# Altium PCB DiPho.PcbDoc
Units mm, origin at the board's own origin, x right, y up, seen from the top; angles counter-clockwise.
Board outline 25 x 25 mm, 2 copper layers (Top Layer, Bottom Layer), stack 1.571 mm thick; 59 components, 44 nets, 286 pads, 34 vias.
Unrouted connection lines stored in the file: 97.
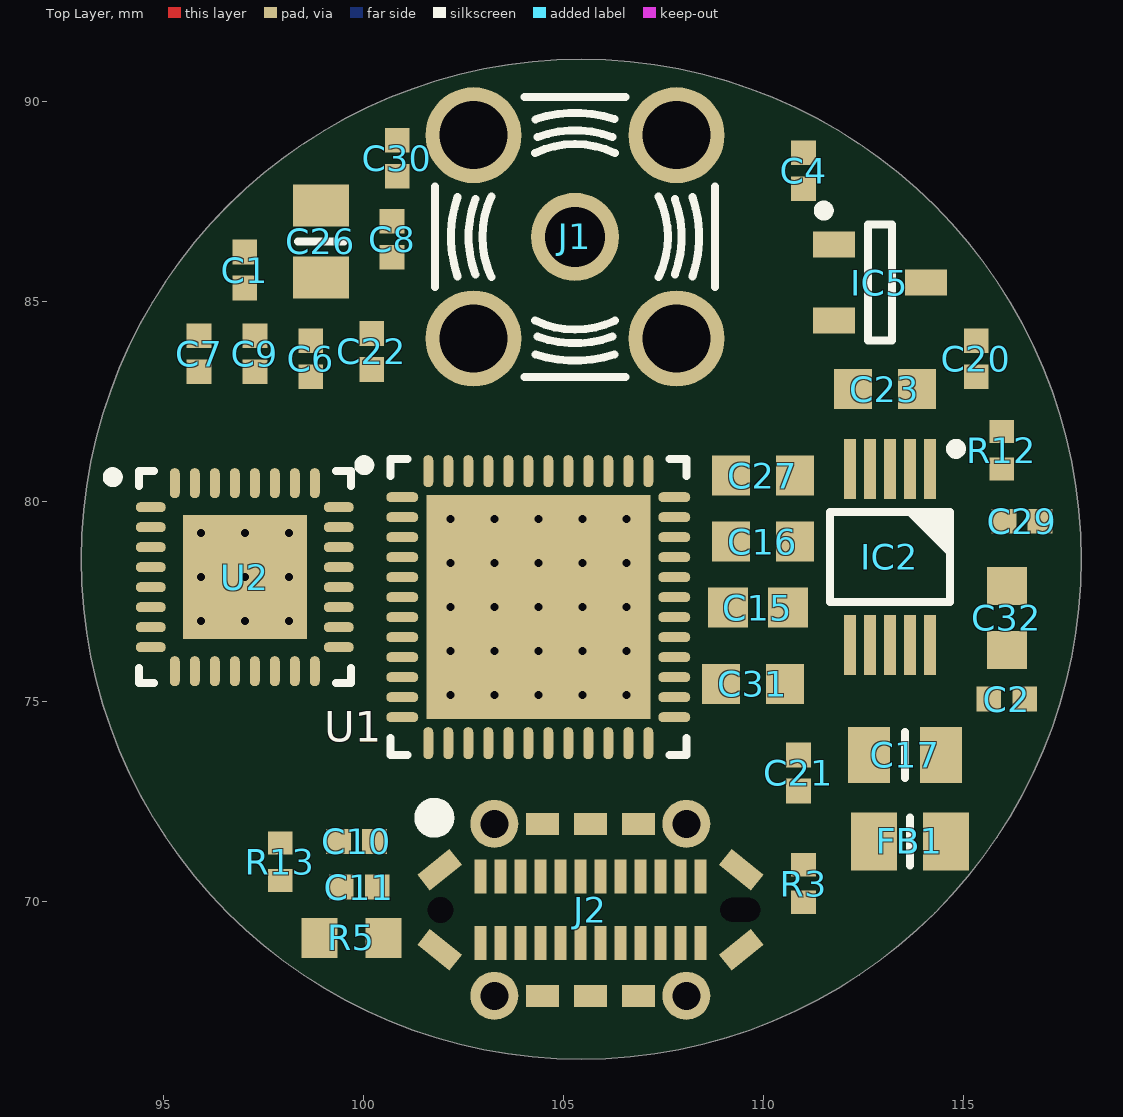
[diagram p0: Top Layer view]
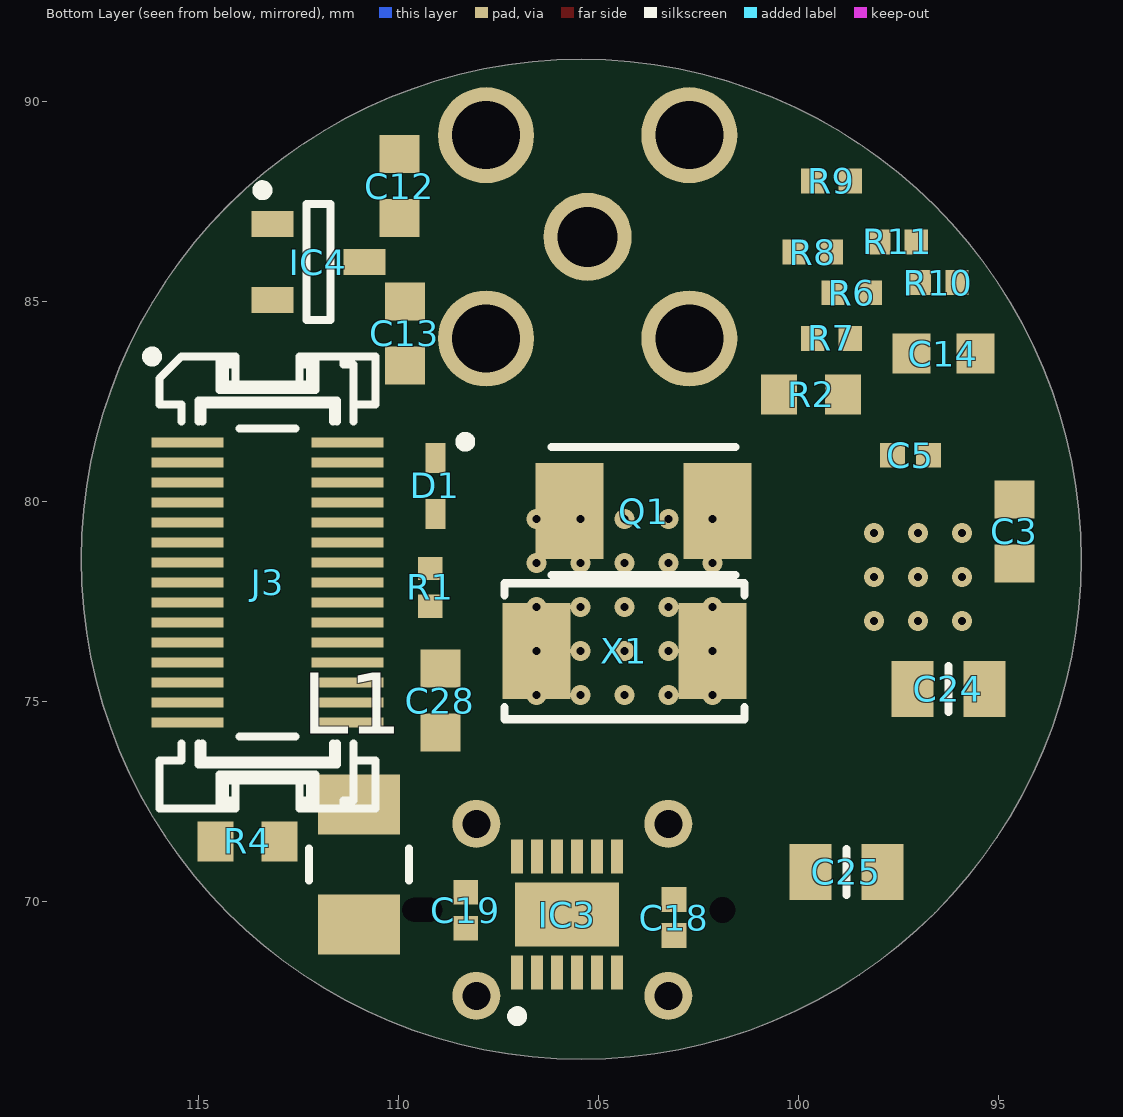
[diagram p1: Bottom Layer view, seen from below]

## Layer stack, top to bottom
Top Solder: solder mask 0.0102, Solder Resist, Dk 3.5
Top Layer: signal copper 0.0356
Dielectric 1: dielectric 1.5, FR-4, Dk 4.8
Bottom Layer: signal copper 0.0356
Bottom Solder: solder mask 0.0102, Solder Resist, Dk 3.5

## Board outline
92.941,78.552 ccw(c105.441,78.552) 105.441,66.052 ccw(c105.441,78.552) 117.941,78.552 ccw(c105.441,78.552) 105.441,91.052 ccw(c105.441,78.552)

## Design rules (kind name [scope] priority, off if disabled: settings)
Clearance [All] p1: gap=0.254 ignorepadtopadclearanceinfootprint=FALSE except(0: Arc-Hole Track-Hole SMDPad-Hole THPad-Hole Via-Hole Fill-Hole Poly-Hole Region-Hole Text-Hole)
DiffPairsRouting [All] p1: maxlimit=0.254 minlimit=0.254 mostfreqgap=0.254 toplayer_minwidth=0.381 toplayer_maxwidth=0.381 toplayer_prefwidth=0.381 bottomlayer_minwidth=0.381 bottomlayer_maxwidth=0.381 bottomlayer_prefwidth=0.381 maxuncoupledlength=12.7
PolygonConnect [All] p1: connectstyle=Relief reliefconductorwidth=0.254 reliefentries=4 polygonreliefangle="90 Angle" airgapwidth=0.254
RoomDefinition U_LAN [InComponentClass('U_LAN')] p1: confinementstyle=ConfineIn formatcopy=TRUE lockcomponents=FALSE outline 118.999,105.537 232.156,105.537 232.156,111.633 118.999,111.633
RoomDefinition "U_DiPho supply" [InComponentClass('U_DiPho supply')] p2: confinementstyle=ConfineIn formatcopy=TRUE lockcomponents=FALSE outline 119.126,95.377 188.849,95.377 188.849,104.267 119.126,104.267
RoomDefinition U_DiPHO_MCU [InComponentClass('U_DiPHO_MCU')] p3: confinementstyle=ConfineIn formatcopy=TRUE lockcomponents=FALSE outline 119.126,83.566 172.339,83.566 172.339,94.234 119.126,94.234
RoomDefinition DiPho_main [InComponentClass('DiPho_main')] p4: confinementstyle=ConfineIn formatcopy=TRUE lockcomponents=FALSE outline 118.999,67.564 147.701,67.564 147.701,82.296 118.999,82.296
RoutingVias [All] p1: holewidth=0.711 width=1.27 viastyle="Through Hole" minholewidth=0.711 minwidth=1.27 maxholewidth=0.711 maxwidth=1.27
SolderMaskExpansion [All] p1: expansion=0.102 istentingtop=FALSE
Width [All] p1: maxlimit=0.254 minlimit=0.254 preferedwidth=0.254
29 further rules are at their usual default settings.

## Classes and differential pairs
component class U_LAN: C10 C11 C12 C13 C14 C15 C16 C17 C18 C19 C20 C21 C22 C23 FB1 R2 R3 R4 R5 R6 R7 R8 R9 R10 R11 U2 X1
component class "U_DiPho supply": C24 C25 C26 C27 C28 C29 C30 C31 C32 IC3 IC4 IC5 L1 R12 R13
component class U_DiPHO_MCU: C1 C2 C3 C4 C5 C6 C7 C8 C9 D1 Q1 R1 U1
component class DiPho_main: IC2 J1 J2 J3
differential pair RJ45_TX: +RJ45_TX_P -RJ45_TX_N
differential pair RJ45_RX: +RJ45_RX_P -RJ45_RX_N
differential pair RJ45_RX_C: +RJ45_RX_C_P -RJ45_RX_C_N

## Components (designator, comment, footprint, x,y, rotation, side; value= is the part's Value field where it differs from the comment)
C1 "1nF" CAPC1005X55N 97.028,85.783 r270 top
C2 "1nF" CAPC1005X55N 116.078,75.057 r180 top
C3 "1uF" CAPC1608X87N 94.615,79.248 r270 bottom
C4 "22pF" CAPC1005X55N 110.998,88.265 r270 top
C5 "22pF" CAPC1005X55N 97.213,81.153 r0 bottom
C6 "100nF" CAPC1005X55N 98.679,83.566 r270 top
C7 "100nF" CAPC1005X55N 95.885,83.693 r270 top
C8 "100nF" CAPC1005X55N 100.711,86.556 r270 top
C9 "100nF" CAPC1005X55N 97.282,83.693 r90 top
C10 "22pF" CAPC1005X55N 99.822,71.501 r180 top
C11 "22pF" CAPC1005X55N 99.891,70.358 r0 top
C12 "6.8nF" CAPC1608X87N 109.982,87.884 r270 bottom
C13 "6.8nF" CAPC1608X87N 109.855,84.201 r270 bottom
C14 "10nF" CAPC1608X87N 96.393,83.693 r0 bottom
C15 "10uF" CAPC1608X80N 109.855,77.343 r0 top
C16 "10nF" CAPC1608X87N 109.982,78.994 r0 top
C17 "10uF" CAPC2012X135N 113.538,73.66 r180 top
C18 "100nF" CAPC1005X55N 103.124,69.596 r270 bottom
C19 "100nF" CAPC1005X55N 108.331,69.781 r270 bottom
C20 "100nF" CAPC1005X55N 115.316,83.566 r270 top
C21 "100nF" CAPC1005X55N 110.871,73.21 r270 top
C22 "100nF" CAPC1005X55N 100.203,83.751 r270 top
C23 "6.8nF" CAPC1608X87N 113.03,82.804 r0 top
C24 "10uF" CAPC2012X135N 96.266,75.311 r0 bottom
C25 "22uF" CAPC2012X135N 98.817,70.739 r0 bottom
C26 "22uF" CAPC2012X135N 98.933,86.498 r90 top
C27 "2.2uF" CAPC1608X87N 109.982,80.645 r0 top
C28 "1uF" CAPC1608X87N 108.966,75.019 r270 bottom
C29 "100nF" CAPC1005X55N 116.459,79.502 r0 top
C30 "100nF" CAPC1005X55N 100.838,88.577 r270 top
C31 "1uF" CAPC1608X87N 109.728,75.438 r180 top
C32 "1uF" CAPC1608X87N 116.078,77.089 r270 top
D1 "1PS79SB70" SODFL1608X65N 109.093,80.391 r270 bottom
FB1 "220R@100MHz" INDC2012X105N 113.654,71.501 r180 top
IC2 "ADS1115IDGST" SOP50P490X110-10N 113.157,78.613 r270 top
IC3 "TPS63710DRR" SON50P300X300X80-13N-R160X260 105.795,69.67 r90 bottom
IC4 "NCP51460SN33T1G" SOT95P240X110-3N 112.014,85.979 r180 bottom
IC5 "AP7313-33SAG-7" SOT95P240X130-3N 112.903,85.471 r0 top
J1 "SMA" AMPHENOL_132134 105.283,86.614 r180 top
J2 "USB C" AMPHENOL_10132328-10011LF 105.668,69.791 r0 top
J3 "SlimStack™" MOLEX_52991-0308 113.284,77.978 r270 bottom
L1 "2.2uH" INDM3225X210N 110.998,70.917 r90 bottom
Q1 "8MHz" XTAL_TXC_7A 103.886,79.756 r0 bottom
R1 "10k" RESC1005X40N 109.22,77.851 r90 bottom
R2 "12k4" RESC1608X55N 99.695,82.677 r0 bottom
R3 "1M5" RESC1005X40N 110.998,70.447 r90 top
R4 "12k4" RESC1608X55N 113.792,71.501 r0 bottom
R5 "12k4" RESC1608X55N 99.695,69.088 r180 top
R6 "49R9" RESC1005X40N 98.679,85.217 r0 bottom
R7 "49R9" RESC1005X40N 99.187,84.074 r0 bottom
R8 "49R9" RESC1005X40N 99.657,86.233 r0 bottom
R9 "10" RESC1005X40N 99.187,88.011 r0 bottom
R10 "49R9" RESC1005X40N 96.52,85.471 r0 bottom
R11 "49R9" RESC1005X40N 97.536,86.487 r0 bottom
R12 "150k" RESC1005X40N 115.951,81.28 r270 top
R13 "43k" RESC1005X40N 97.917,70.993 r270 top
U1 "STM32F072CBU6" STM-UFQFPN48_L 104.365,77.355 r0 top
U2 "KSZ8851SNLI TR" MCHP-MLF-32_L 97.028,78.105 r0 top
X1 "QSDG25M000-TXC" XTAL_5.0*3.2 104.365,76.255 r0 bottom

## Footprints (in the part's own frame and the unit in brackets; to place one, negate y for a bottom-side part, rotate by r counter-clockwise, add the part's x,y. Pads: shape width x height; smd on the part's side, far side on the other; paste and mask are expansions set on the pad)
AMPHENOL_132134 [mm] "50 Ohm Through Hole SMA Straight PCB Jack"
  round 2.2 hole 1.5: 1(0,0)
  round 2.4 hole 1.7: 2(-2.54,2.54) 2(-2.54,-2.54) 2(2.54,2.54) 2(2.54,-2.54)
  silkscreen extent -3.5,-3.5 3.5,3.5, body extent -3.5,-3.5 3.5,3.5, height 9.53
AMPHENOL_10132328-10011LF [mm] "1 Port Vertical Receptacle 24 Contacts, USB Type C Input Output Connector"
  rect 0.3x0.85 smd: A1(-2.75,0.83) A2(-2.25,0.83) A3(-1.75,0.83) A4(-1.25,0.83) A5(-0.75,0.83) A6(-0.25,0.83) A7(0.25,0.83) A8(0.75,0.83) A9(1.25,0.83) A10(1.75,0.83) A11(2.25,0.83) A12(2.75,0.83) B1(2.75,-0.83) B2(2.25,-0.83) B3(1.75,-0.83) B4(1.25,-0.83) B5(0.75,-0.83) B6(0.25,-0.83) B7(-0.25,-0.83) B8(-0.75,-0.83) B9(-1.25,-0.83) B10(-1.75,-0.83) B11(-2.25,-0.83) B12(-2.75,-0.83)
  round 0.25 hole 0.65 unplated mask+0.2: MECH(-3.75,0)
  oval 0.6x0.2 hole 0.6 slot 1 at 0 deg unplated mask+0.2: MECH(3.75,0)
  rect 1.03x0.5 smd rot 141: SHIELD(-3.77,-1) SHIELD(3.77,1)
  rect 1.03x0.5 smd rot 39: SHIELD(-3.77,1) SHIELD(3.77,-1)
  round 1.2 hole 0.7: SHIELD(-2.4,-2.15) SHIELD(-2.4,2.15) SHIELD(2.4,-2.15) SHIELD(2.4,2.15)
  rect 0.82x0.55 smd: SHIELD(-1.2,-2.15) SHIELD(-1.2,2.15) SHIELD(0,-2.15) SHIELD(0,2.15) SHIELD(1.2,-2.15) SHIELD(1.2,2.15)
  silkscreen extent -4.15,2.05 -3.65,2.55, body extent -4.37,-2.25 4.37,2.25, height 8.83
CAPC1005X55N [mm] "Capacitor, Non-Polarized, Chip; 1.00mm L X 0.50mm W X 0.70mm H, IPC Medium Density"
  rect 0.62x0.62 smd: 1(-0.45,0) 2(0.45,0)
  body extent -0.52,-0.27 0.53,0.28, height 0.55
CAPC1608X80N [mm] "Chip Capacitor, Body 1.6x0.8mm IPC Medium Density"
  rect 1x1 smd: 1(-0.75,0) 2(0.75,0)
  body extent -0.87,-0.47 0.88,0.48, height 0.8
CAPC1608X87N [mm] "Chip Capacitor, Body 1.6x0.8mm IPC Medium Density"
  rect 0.95x1 smd: 1(-0.8,0) 2(0.8,0)
  body extent -0.87,-0.47 0.88,0.48, height 0.87
CAPC2012X135N [mm] "Chip Capacitor, Body 2.0x1.25mm, IPC Medium Density"
  rect 1.05x1.4 smd: 1(-0.9,0) 2(0.9,0)
  silkscreen extent 0,-0.58 0,0.58, body extent -1.05,-0.67 1.05,0.68, height 1.25
INDC2012X105N [mm] "Chip Inductor, EIA 0805, Metric 2012, Body 2.0x1.25mm, IPC Medium Density"
  rect 1.15x1.45 smd: 1(-0.9,0) 2(0.9,0)
  silkscreen extent 0,-0.6 0,0.6, body extent -1.1,-0.7 1.1,0.7, height 1.1
INDM3225X210N [mm] "Inductor, Molded Body; 3.20mm L X 2.50mm W, IPC Medium Density"
  rect 1.5x2.05 smd: 1(-1.5,0) 2(1.5,0)
  silkscreen extent -0.4,-1.25 0.4,1.25, body extent -1.7,-1.35 1.7,1.35, height 2.1
MCHP-MLF-32_L [mm] "QFN, 32-Leads, Body 5.00x5.00mm, Pitch 0.50mm, Thermal Pad 3.10x3.10mm, IPC High Density"
  oval 0.75x0.25 smd: 1(-2.35,1.75) 2(-2.35,1.25) 3(-2.35,0.75) 4(-2.35,0.25) 5(-2.35,-0.25) 6(-2.35,-0.75) 7(-2.35,-1.25) 8(-2.35,-1.75) 17(2.35,-1.75) 18(2.35,-1.25) 19(2.35,-0.75) 20(2.35,-0.25) 21(2.35,0.25) 22(2.35,0.75) 23(2.35,1.25) 24(2.35,1.75)
  oval 0.25x0.75 smd: 9(-1.75,-2.35) 10(-1.25,-2.35) 11(-0.75,-2.35) 12(-0.25,-2.35) 13(0.25,-2.35) 14(0.75,-2.35) 15(1.25,-2.35) 16(1.75,-2.35) 25(1.75,2.35) 26(1.25,2.35) 27(0.75,2.35) 28(0.25,2.35) 29(-0.25,2.35) 30(-0.75,2.35) 31(-1.25,2.35) 32(-1.75,2.35)
  rect 3.1x3.1 smd: 33(0,0)
  silkscreen extent -3.42,-2.65 2.65,2.65, body extent -2.5,-2.5 2.5,2.5, height 0.9
MOLEX_52991-0308 [mm] "0.50mm Pitch SlimStack™ Dual Row 30 Circuits Surface Mount Vertical Receptacle (3.00 and 4.00mm Stacking Heights)"
  rect 0.25x1.8 smd: 1(-3.5,-2) 2(-3.5,2) 3(-3,-2) 4(-3,2) 5(-2.5,-2) 6(-2.5,2) 7(-2,-2) 8(-2,2) 9(-1.5,-2) 10(-1.5,2) 11(-1,-2) 12(-1,2) 13(-0.5,-2) 14(-0.5,2) 15(0,-2) 16(0,2) 17(0.5,-2) 18(0.5,2) 19(1,-2) 20(1,2) 21(1.5,-2) 22(1.5,2) 23(2,-2) 24(2,2) 25(2.5,-2) 26(2.5,2) 27(3,-2) 28(3,2) 29(3.5,-2) 30(3.5,2)
  silkscreen extent -5.77,-3.01 5.65,2.7, body extent -5.65,-2.7 5.65,2.7, height 2.32
RESC1005X40N [mm] "Chip Resistor, EIA 0402, Metric 1005, Body 1.0x0.5mm, IPC Medium Density"
  rect 0.58x0.62 smd: 1(-0.47,0) 2(0.47,0)
  body extent -0.52,-0.27 0.53,0.28, height 0.4
RESC1608X55N [mm] "Chip Resistor, EIA 0603, Metric 1608, Body 1.6x0.8mm, IPC Medium Density"
  rect 0.9x1 smd: 1(-0.8,0) 2(0.8,0)
  body extent -0.87,-0.47 0.88,0.48, height 0.55
SODFL1608X65N [mm] "Ultra Small Outline Diode Flat Lead (SOD-523), Body; 1.2mm L X 0.8mm W X 0.65mm H, IPC Medium Density"
  rect 0.75x0.5 smd: 1(-0.7,0) 2(0.7,0)
  silkscreen extent -1.22,0.63 -0.98,0.87, body extent -0.82,-0.42 0.83,0.43, height 0.65
SON50P300X300X80-13N-R160X260 [mm] "SON, 0.50mm Pitch, 12-Pin, 3.00mm W  X 3.00mm L X 0.80mm Height, (w/Thermal Tab 1.6 X 2.6 mm), IPC Medium Density"
  rect 0.85x0.3 smd: 1(-1.45,1.25) 2(-1.45,0.75) 3(-1.45,0.25) 4(-1.45,-0.25) 5(-1.45,-0.75) 6(-1.45,-1.25) 7(1.45,-1.25) 8(1.45,-0.75) 9(1.45,-0.25) 10(1.45,0.25) 11(1.45,0.75) 12(1.45,1.25)
  rect 1.6x2.6 smd: 13(0,0)
  silkscreen extent -2.66,1.13 -2.42,1.38, body extent -1.5,-1.5 1.5,1.5, height 0.8
SOP50P490X110-10N [mm] "MSOP, 10-Leads, Body 3.1x3.1mm (max), Pitch 0.50mm, IPC Medium Density"
  rect 1.5x0.3 smd: 1(-2.2,1) 2(-2.2,0.5) 3(-2.2,0) 4(-2.2,-0.5) 5(-2.2,-1) 6(2.2,-1) 7(2.2,-0.5) 8(2.2,0) 9(2.2,0.5) 10(2.2,1)
  silkscreen extent -2.82,-1.5 1.12,1.78, body extent -2.45,-1.55 2.45,1.55, height 1.1
SOT95P240X110-3N [mm] "SOT23 3-Leads, Pitch 0.95mm, Body 1.3x2.9mm, IPC Medium Density"
  rect 1.05x0.65 smd: 1(-1.15,0.95) 2(-1.15,-0.95) 3(1.15,0)
  silkscreen extent -1.53,-1.45 0.3,1.92, body extent -1.25,-1.5 1.25,1.5, height 1.1
SOT95P240X130-3N [mm] "SOT23 3-Leads, Pitch 0.95mm - Body 1.3x2.9mm, IPC Medium Density"
  rect 1.05x0.65 smd: 1(-1.15,0.95) 2(-1.15,-0.95) 3(1.15,0)
  silkscreen extent -1.52,-1.45 0.3,1.92, body extent -1.25,-1.5 1.25,1.5, height 1.3
STM-UFQFPN48_L [mm] "QFN, 48-Leads, Body 7.1x7.1mm, Pitch 0.5mm, Thermal Pad 5.6x5.6mm, IPC High Density"
  oval 0.8x0.25 smd: 1(-3.4,2.75) 2(-3.4,2.25) 3(-3.4,1.75) 4(-3.4,1.25) 5(-3.4,0.75) 6(-3.4,0.25) 7(-3.4,-0.25) 8(-3.4,-0.75) 9(-3.4,-1.25) 10(-3.4,-1.75) 11(-3.4,-2.25) 12(-3.4,-2.75) 25(3.4,-2.75) 26(3.4,-2.25) 27(3.4,-1.75) 28(3.4,-1.25) 29(3.4,-0.75) 30(3.4,-0.25) 31(3.4,0.25) 32(3.4,0.75) 33(3.4,1.25) 34(3.4,1.75) 35(3.4,2.25) 36(3.4,2.75)
  oval 0.25x0.8 smd: 13(-2.75,-3.4) 14(-2.25,-3.4) 15(-1.75,-3.4) 16(-1.25,-3.4) 17(-0.75,-3.4) 18(-0.25,-3.4) 19(0.25,-3.4) 20(0.75,-3.4) 21(1.25,-3.4) 22(1.75,-3.4) 23(2.25,-3.4) 24(2.75,-3.4) 37(2.75,3.4) 38(2.25,3.4) 39(1.75,3.4) 40(1.25,3.4) 41(0.75,3.4) 42(0.25,3.4) 43(-0.25,3.4) 44(-0.75,3.4) 45(-1.25,3.4) 46(-1.75,3.4) 47(-2.25,3.4) 48(-2.75,3.4)
  rect 5.6x5.6 smd: 49(0,0)
  silkscreen extent -4.47,-3.7 3.7,3.7, body extent -3.55,-3.55 3.55,3.55, height 0.6
XTAL_5.0*3.2 [mm]
  rect 1.7x2.4 smd: 1(-2.2,0) 2(2.2,0)
  silkscreen extent -3,-1.7 3,1.7, body extent -3.05,-1.8 3.05,1.7, height 1.44
XTAL_TXC_7A [mm] "2 Pins, 3.2x5mm, SMD Glass Seam Sealing Crystal, 7A Serie"
  rect 1.7x2.4 smd: 1(-1.85,0) 2(1.85,0)
  silkscreen extent -2.3,-1.6 2.3,1.6, body extent -2.5,-1.6 2.5,1.6, height 1.2

## Part data
C1 C2: library part CC0402_1NF_50V_5%_C0G, "Non-polarised capacitor", Case=0402, Manufacturer=GENERIC, Manufacturer1 ComponentHeight=0.55mm, Manufacturer1 Example=KEMET, Manufacturer1 Part Number=C0402C102J5GACTU, Tolerance=±5%, Voltage=50V, Author="CERN DEM BC", Component Type=Standard, CreateDate=02/09/2019, HelpURL="\\cern.ch\dfs\Applications\Altium\Datasheets\CC0402_C0G_KEMET_(Commercial Grade).pdf", LatestRevisionDate=02/09/2019, Manufacturer Part Number=CC0402_1NF_50V_5%_C0G, Mounted=Yes, Part Description="SMD Multilayer Chip Ceramic Capacitor", Part Number=CC0402_1NF_50V_5%_C0G, Pin Count=2, Sense=No, SMD=Yes, Socket=No, Status=Preferred, TC=C0G/NP0
C3 C28 C31 C32: library part CC0603_1UF_16V_10%_X7R, "Non-polarised capacitor", Case=0603, Manufacturer=GENERIC, Manufacturer1 ComponentHeight=0.9mm, Manufacturer1 Example="YAGEO PHYCOMP", Manufacturer1 Part Number=223878615663, Manufacturer Part Number=CC0603_1uF_16V_10%_X7R, Tolerance=±10%, Voltage=16V, Author="CERN DEM JLC", Component Type=Standard, CreateDate=03.12.2007, HelpURL=\\cern.ch\dfs\Applications\Altium\Datasheets\CC0603_X7R_PHYCOMP.pdf, LatestRevisionDate=17.04.2015, Mounted=Yes, Part Description="SMD Multilayer Chip Ceramic Capacitor", Part Number=CC0603_1UF_16V_10%_X7R, Pin Count=2, Sense=No, SMD=Yes, Socket=No, Status=None, TC=X7R
C4 C5: library part CC0402_22PF_50V_5%_C0G, "Non-polarised capacitor", Case=0402, Manufacturer=GENERIC, Manufacturer1 ComponentHeight=0.55mm, Manufacturer1 Example=KEMET, Manufacturer1 Part Number=C0402C220J5GACTU, Tolerance=±5%, Voltage=50V, Author="CERN DEM JLC", Component Type=Standard, CreateDate=03.12.2007, HelpURL="\\cern.ch\dfs\Applications\Altium\Datasheets\CC0805_C0G_KEMET_(Commercial Grade).pdf", LatestRevisionDate=03.12.2007, Manufacturer Part Number=CC0402_22PF_50V_5%_C0G, Mounted=Yes, Part Description="SMD Multilayer Chip Ceramic Capacitor", Part Number=CC0402_22PF_50V_5%_C0G, Pin Count=2, Sense=No, SMD=Yes, Socket=No, Status=Preferred, TC=C0G/NP0
C6 C7 C8 C9 C18 C19 C20 C21 C22: library part CC0402_100NF_16V_10%_X7R, "Non-polarised capacitor", Case=0402, Manufacturer=GENERIC, Manufacturer1 ComponentHeight=0.55mm, Manufacturer1 Example=MURATA, Manufacturer1 Part Number=GRM155R71C104KA88D, Tolerance=±10%, Voltage=16V, Author="CERN DEM JLC", Component Type=Standard, CreateDate=05.12.2013, HelpURL=\\cern.ch\dfs\Applications\Altium\Datasheets\CC0402_X7R_MURATA_GRM.pdf, LatestRevisionDate=03.12.2007, Manufacturer Part Number=CC0402_100NF_16V_10%_X7R, Mounted=Yes, Part Description="SMD Multilayer Chip Ceramic Capacitor", Part Number=CC0402_100NF_16V_10%_X7R, Pin Count=2, Sense=No, SMD=Yes, Socket=No, Status="Not Recommended", TC=X7R
C10 C11: library part CC0402_22PF_50V_5%_NP0, "Non-polarised capacitor", Case=0402, Manufacturer=GENERIC, Manufacturer1 ComponentHeight=0.55mm, Manufacturer1 Example=PHYCOMP, Manufacturer1 Part Number=223886915229, Tolerance=±5%, Voltage=50V, Author="CERN DEM JLC", Component Type=Standard, CreateDate=2007-12-03, HelpURL=\\cern.ch\dfs\Applications\Altium\Datasheets\CC0402_NP0_PHYCOMP.pdf, LatestRevisionDate=2007-12-03, Manufacturer Part Number=CC0402_22PF_50V_5%_NP0, Mounted=Yes, Part Description="SMD Multilayer Chip Ceramic Capacitor", Part Number=CC0402_22PF_50V_5%_NP0, Pin Count=2, SMD=Yes, Socket=No, Status="Not Recommended", Table="Capacitors SMD", TC=NP0
C12 C13 C23: library part CC0603_6.8NF_25V_1%_C0G, "Non-polarised capacitor", Case=0603, Manufacturer=GENERIC, Manufacturer1 ComponentHeight=0.87mm, Manufacturer1 Example=KEMET, Manufacturer1 Part Number=C0603C682F3GACTU, Tolerance=±1%, Voltage=25V, Author="CERN DEM JLC", Component Type=Standard, CreateDate=23/05/2018, HelpURL="\\cern.ch\dfs\Applications\Altium\Datasheets\CC0603_C0G_KEMET_(Commercial Grade).pdf", LatestRevisionDate=23/05/2018, Manufacturer Part Number=CC0603_6.8NF_25V_1%_C0G, Mounted=Yes, Part Description="SMD Multilayer Chip Ceramic Capacitor", Part Number=CC0603_6.8NF_25V_1%_C0G, Pin Count=2, Sense=No, SMD=Yes, Socket=No, Status=None, TC=C0G/NP0
C14 C16: library part CC0603_10NF_50V_5%_C0G, "Non-polarised capacitor", Case=0603, Manufacturer=GENERIC, Manufacturer1 ComponentHeight=0.9mm, Manufacturer1 Example=TDK, Manufacturer1 Part Number=C1608C0G1H103J080AA, Tolerance=±5%, Voltage=50V, Author="CERN DEM JLC", Component Type=Standard, CreateDate=10.12.2014, HelpURL=\\cern.ch\dfs\Applications\Altium\Datasheets\CC0603_C0G_TDK_C.pdf, LatestRevisionDate=10.12.2014, Manufacturer Part Number=CC0603_10NF_50V_5%_C0G, Mounted=Yes, Part Description="SMD Multilayer Chip Ceramic Capacitor", Part Number=CC0603_10NF_50V_5%_C0G, Pin Count=2, Sense=No, SMD=Yes, Socket=No, Status=Preferred, TC=C0G/NP0
C15: library part CC0603_10UF_16V_20%_X5R, "Non-polarised capacitor", Case=0603, Manufacturer=GENERIC, Manufacturer1 ComponentHeight=0.8mm, Manufacturer1 Example=MURATA, Manufacturer1 Part Number=GRM188R61C106MA73D, Tolerance=±20%, Voltage=16V, Author="CERN DEM MR", Component Type=Standard, CreateDate=02/03/2016, HelpURL=\\cern.ch\dfs\Applications\Altium\Datasheets\CC0603_X5R_MURATA_GRM.pdf, LatestRevisionDate=02/03/2016, Manufacturer Part Number=CC0603_10UF_16V_20%_X5R, Mounted=Yes, Part Description="SMD Multilayer Chip Ceramic Capacitor", Part Number=CC0603_10UF_16V_20%_X5R, Pin Count=2, Sense=No, SMD=Yes, Socket=No, Status=None, TC=X5R
C17: library part CC0805_10UF_10V_10%_X7R, "Non-polarised capacitor", Case=0805, Manufacturer=GENERIC, Manufacturer1 ComponentHeight=1.35mm, Manufacturer1 Example=MURATA, Manufacturer1 Part Number=GRM21BR71A106KE51L, Tolerance=±10%, Voltage=10V, Author="CERN DEM JLC", Component Type=Standard, CreateDate=2012-04-30, HelpURL=\\cern.ch\dfs\Applications\Altium\Datasheets\CC0805_X7R_MURATA.pdf, LatestRevisionDate=2012-04-30, Manufacturer Part Number=CC0805_10UF_10V_10%_X7R, Mounted=Yes, Part Description="SMD Multilayer Chip Ceramic Capacitor", Part Number=CC0805_10UF_10V_10%_X7R, Pin Count=2, SMD=Yes, Socket=No, Status=Preferred, Table="Capacitors SMD", TC=X7R
C24: library part CC0805_10UF_16V_10%_X5R, "Non-polarised capacitor", Case=0805, Manufacturer=GENERIC, Manufacturer1 ComponentHeight=1.4mm, Manufacturer1 Example=KEMET, Manufacturer1 Part Number=C0805C106K4PAC, Tolerance=±10%, Voltage=16V, Author="CERN DEM JLC", Component Type=Standard, CreateDate=03.12.2007, HelpURL=\\cern.ch\dfs\Applications\Altium\Datasheets\CC1206_X5R_KEMET.pdf, LatestRevisionDate=03.12.2007, Manufacturer Part Number=CC0805_10UF_16V_10%_X5R, Mounted=Yes, Part Description="SMD Multilayer Chip Ceramic Capacitor", Part Number=CC0805_10UF_16V_10%_X5R, Pin Count=2, Sense=No, SMD=Yes, Socket=No, Status=Preferred, TC=X5R
C25 C26: library part CC0805_22UF_16V_10%_X5R, "Non-polarised capacitor", Case=0805, Manufacturer=GENERIC, Manufacturer1 ComponentHeight=1.35mm, Manufacturer1 Example=TDK, Manufacturer1 Part Number=C2012X5R1C226KT, Tolerance=±10%, Voltage=16V, Author="CERN DEM JLC", Component Type=Standard, CreateDate=25.10.2012, HelpURL=\\cern.ch\dfs\Applications\Altium\Datasheets\CC0805_X5R_TDK_C.pdf, LatestRevisionDate=25.10.2012, Manufacturer Part Number=CC0805_22UF_16V_10%_X5R, Mounted=Yes, Part Description="SMD Multilayer Chip Ceramic Capacitor", Part Number=CC0805_22UF_16V_10%_X5R, Pin Count=2, Sense=No, SMD=Yes, Socket=No, Status=Preferred, TC=X5R
C27: library part CC0603_2.2UF_16V_10%_X5R, "Non-polarised capacitor", Case=0603, Manufacturer=GENERIC, Manufacturer1 ComponentHeight=0.9mm, Manufacturer1 Example=YAGEO, Manufacturer1 Part Number=CC0603KRX5R7BB225, Tolerance=±10%, Voltage=16V, Author="CERN DEM JLC", Component Type=Standard, CreateDate=28.04.2011, HelpURL=\\cern.ch\dfs\Applications\Altium\Datasheets\CC0805_X5R_PHYCOMP_HC.pdf, LatestRevisionDate=28.04.2011, Manufacturer Part Number=CC0603_2.2UF_16V_10%_X5R, Mounted=Yes, Part Description="SMD Multilayer Chip Ceramic Capacitor", Part Number=CC0603_2.2UF_16V_10%_X5R, Pin Count=2, Sense=No, SMD=Yes, Socket=No, Status=Preferred, TC=X5R
C29 C30: library part CC0402_100NF_16V_10%_X5R, "Non-polarised capacitor", Case=0402, Manufacturer=GENERIC, Manufacturer1 ComponentHeight=0.55mm, Manufacturer1 Example=MURATA, Manufacturer1 Part Number=GRM155R61C104KA88D, Tolerance=±10%, Voltage=16V, Author="CERN DEM JLC", Component Type=Standard, CreateDate=10.12.2013, HelpURL=\\cern.ch\dfs\Applications\Altium\Datasheets\CC0402_X5R_MURATA_GRM.pdf, LatestRevisionDate=10.12.2013, Manufacturer Part Number=CC0402_100NF_16V_10%_X5R, Mounted=Yes, Part Description="SMD Multilayer Chip Ceramic Capacitor", Part Number=CC0402_100NF_16V_10%_X5R, Pin Count=2, Sense=No, SMD=Yes, Socket=No, Status=None, TC=X5R
D1: "Diode", Case=SOD523, Manufacturer=NEXPERIA, Power=70mA, Voltage=70V, Author=GK, Bonding=No, Component Type=Standard, ComponentHeight=0.65mm, CreateDate=11/09/2018, Device=1PS79SB70, HelpURL=\\cern.ch\dfs\Applications\Altium\Datasheets\BAS516.pdf, LatestRevisionDate=11/09/2018, Manufacturer Part Number=1PS79SB70, Mounted=Yes, PackageDescription="Ultra Small Outline Diode Flat Lead (SOD-523), Body; 1.2mm L X 0.8mm W X 0.65mm H, IPC Medium Density", Part Description="High-speed switching diode", Part Number=1PS79SB70, Pin Count=2, PressFit=No, Sense=No, SMD=Yes, Socket=No
FB1: library part IND0805_MURATA_BLM21PG221SN1D, "Inductor", Case=0805, Manufacturer=MURATA, Manufacturer Part Number=BLM21PG221SN1D, Power=2A, Resistance=0.05R, Tolerance=±25%, Author="CERN DEM JLC", Component Type=Standard, ComponentHeight=1.05mm, CreateDate=2010-01-25, HelpURL=\\cern.ch\dfs\Applications\Altium\Datasheets\IND0402_MURATA_BLM21P.pdf, LatestRevisionDate=2010-01-25, Mounted=Yes, Part Description="SMD EMIFIL Suppression Chip Ferrite Bead", Part Number=IND0805_MURATA_BLM21PG221SN1D, Pin Count=2, SMD=Yes, Socket=No, Status=None, Table="Inductors SMD"
IC2: "Ultra-Small, Low-Power, 16-Bit Analog-to-Digital Converter with Internal Reference", Case=MSOP10, Manufacturer="TEXAS INSTRUMENTS", Author="CERN DEM JLC", Bonding=No, Component Type=Standard, ComponentHeight=1.1mm, CreateDate=29.10.2012, Device=ADS1115IDGST, HelpURL=\\cern.ch\dfs\Applications\Altium\Datasheets\ADS1115IDGST.pdf, LatestRevisionDate=29.10.2012, Manufacturer Part Number=ADS1115IDGST, Mounted=Yes, PackageDescription="SOP, 0.50mm Pitch; 10 Pin, 3.00mm W X 3.00mm L X 1.10mm H body, IPC Medium Density", Part Description="Ultra-Small, Low-Power, 4 Channels 16-Bit Analog-to-Digital Converter with Internal Reference", Part Number=ADS1115IDGST, Pin Count=10, PressFit=No, Sense=No, SMD=Yes, Socket=No
IC3: "-1 to -5.5VDC, 1A Output, Low Noise Synchronous Inverting Buck Converter", Case=SON12, Manufacturer="TEXAS INSTRUMENTS", Author="CERN DEM BC", Bonding=No, Component Type=Standard, ComponentHeight=0.8mm, CreateDate=11.02.2019, Device=TPS63710DRR, HelpURL=\\cern.ch\dfs\Applications\Altium\Datasheets\TPS63710DRR.pdf, LatestRevisionDate=11.02.2019, Manufacturer Part Number=TPS63710DRR, Mounted=Yes, PackageDescription="SON, 0.50mm Pitch, 12-Pin, 3.00mm W  X 3.00mm L X 0.80mm Height, (w/Thermal Tab 1.6 X 2.6 mm), IPC Medium Density", Part Description="-1 to -5.5VDC, 1A Output, Low Noise Synchronous Inverting Buck Converter", Part Number=TPS63710DRR, Pin Count=13, PressFit=No, Sense=No, SMD=Yes, Socket=No
IC4: "3-Terminal Regulator 1=IN 2=OUT 3=GND", Case=SOT23, Manufacturer="ON SEMICONDUCTOR", Author="CERN DEM MR", Bonding=No, ComponentHeight=1.1mm, Component Type=Standard, CreateDate=05.10.2016, Device=NCP51460SN33T1G, HelpURL=\\cern.ch\dfs\Applications\Altium\Datasheets\NCP51460SN33T1G.pdf, LatestRevisionDate=05.10.2016, Manufacturer Part Number=NCP51460SN33T1G, Mounted=Yes, PackageDescription="SOT23 3-Leads, Pitch 0.95mm - Body 1.4x3mm, IPC Medium Density", Part Description="3.3V, 20mA Micropower Precision Voltage Reference", Part Number=NCP51460SN33T1G, Pin Count=3, PressFit=No, Sense=No, SMD=Yes, Socket=No
IC5: "3-Terminal Regulator 1=IN 2=OUT 3=GND", Case=SOT23, Manufacturer="DIODES INCORPORATED", Author="CERN DEM JLC", Bonding=No, Component Type=Standard, ComponentHeight=1.35mm, CreateDate=20.03.2018, Device=AP7313-33SAG-7, HelpURL=\\cern.ch\dfs\Applications\Altium\Datasheets\AP7313-33SAG-7.pdf, LatestRevisionDate=20.03.2018, Manufacturer Part Number=AP7313-33SAG-7, Mounted=Yes, PackageDescription="SOT23 3-Leads, Pitch 0.95mm - Body 1.3x2.9mm, IPC Medium Density", Part Description="3.3V, 150mA Low Quiescent Current, Fast Transient Low Dropout Linear Regulator", Part Number=AP7313-33SAG-7, Pin Count=3, PressFit=No, Sense=No, SMD=Yes, Socket=No
J1: library part AMPHENOL_132134, Manufacturer=AMPHENOL, Manufacturer Part Number=132134, Author="CERN DEM JLC", Component Type=Standard, ComponentHeight=9.53mm, CreateDate=16.12.2013, Family=SMA, HelpURL=\\cern.ch\dfs\Applications\Altium\Datasheets\AMPHENOL_132134.pdf, LatestRevisionDate=16.12.2013, Mounted=Yes, Part Description="50 Ohm Through Hole SMA Straight PCB Jack", Part Number=AMPHENOL_132134, Pin Count=4, PressFit=No, Sense=No, SMD=No, Socket=No, Status=None
J2: library part AMPHENOL_10132328-10011LF, "2x12 Pin + 1 Shield  USB Type C Receptacle", Manufacturer=AMPHENOL, Manufacturer Part Number=10132328-10011LF, Author="CERN DEM BC", Component Type=Standard, ComponentHeight=8.8mm, CreateDate=23.10.2020, Family="USB C", HelpURL=\\cern.ch\dfs\Applications\Altium\Datasheets\AMPHENOL_10132328-10011LF.pdf, LatestRevisionDate=23.10.2020, Mounted=Yes, Part Description="1 Port Vertical Receptacle 24 Contacts, USB Type C Input Output Connector", Part Number=AMPHENOL_10132328-10011LF, Pin Count=34, PressFit=No, Sense=No, SMD=Yes, Socket=No, Status=None
J3: library part MOLEX_52991-0308, "Connector 30 Female", Manufacturer=MOLEX, Manufacturer Part Number=52991-0308, Author="CERN DEM JLC", Component Type=Standard, ComponentHeight=2.27mm, CreateDate=28.08.2012, Family=SlimStack™, HelpURL=\\cern.ch\dfs\Applications\Altium\Datasheets\MOLEX_52991-0308.pdf, LatestRevisionDate=28.08.2012, Mounted=Yes, Part Description="0.50mm Pitch SlimStack™ Dual Row 30 Circuits Surface Mount Vertical Receptacle (3.00 and 4.00mm Stacking Heights)", Part Number=MOLEX_52991-0308, Pin Count=30, PressFit=No, Sense=No, SMD=Yes, Socket=No, Status=None
L1: library part IND1210_2.2UH_10%_EPCOS_B82422A, "Inductor With Core", Case=1210, Manufacturer=EPCOS, Manufacturer Part Number=B82422A1222K100, Power=270mA, Resistance=0.75R, Tolerance=±10%, Author="CERN DEM JLC", Component Type=Standard, ComponentHeight=2.1mm, CreateDate=01.03.2010, HelpURL=\\cern.ch\dfs\Applications\Altium\Datasheets\IND1210_EPCOS_B82422A.pdf, LatestRevisionDate=01.03.2010, Mounted=Yes, Part Description="SMT Inductor SIMID Series", Part Number=IND1210_2.2UH_10%_EPCOS_B82422A, Pin Count=2, Sense=No, SMD=Yes, Socket=No, Status=None
Q1: library part XTAL_8MHZ_TXC_7A-8.000MAAE-T, "Quartz Crystal", Manufacturer="TXC CORPORATION", Manufacturer Part Number=7A-8.000MAAE-T, Author="CERN DEM JLC", Bonding=No, ComponentHeight=1.2mm, Component Type=Standard, CreateDate=09.10.2014, HelpURL=\\cern.ch\dfs\Applications\Altium\Datasheets\XTAL_TXC_7A.pdf, LatestRevisionDate=12.11.2014, Mounted=Yes, PackageDescription="2 Pins, 3.2x5mm, SMD Glass Seam Sealing Crystal, 7A Serie", Part Description="Tolerance: ±30ppm, Stability: ±30ppm, -20°C to +70°C, 12pF, SMD Glass Seam Sealing Crystal, 7A Series", Part Number=XTAL_8MHZ_TXC_7A-8.000MAAE-T, Pin Count=2, PressFit=No, Sense=No, SMD=Yes, Socket=No
R1: library part R0402_10K_1%_0.0625W_100PPM, "Resistor - 1%", Case=0402, Manufacturer=GENERIC, Manufacturer1 ComponentHeight=0.4mm, Manufacturer1 Example="YAGEO PHYCOMP", Manufacturer1 Part Number=232270671003L, Power=0.0625W, Tolerance=±1%, Author="CERN DEM JLC", Component Type=Standard, CreateDate=03.12.2007, HelpURL=\\cern.ch\dfs\Applications\Altium\Datasheets\R0402_Phycomp_RC0402.pdf, LatestRevisionDate=17.10.2012, Manufacturer Part Number=R0402_10K_1%_0.0625W_100PPM, Mounted=Yes, Part Description="General Purpose Thick Film Chip Resistor", Part Number=R0402_10K_1%_0.0625W_100PPM, Pin Count=2, PressFit=No, Sense=No, SMD=Yes, Socket=No, Status="Not Recommended", TC=±100ppm/°C
R2 R4 R5: library part R0603_12K4_0.1%_0.063W_10PPM, "Resistor - 0.1%", Case=0603, Manufacturer=GENERIC, Manufacturer1 ComponentHeight=0.5mm, Manufacturer1 Example="TYCO HOLSWORTHY", Manufacturer1 Part Number=RN73C1J12K4BTDF, Power=0.063W, Tolerance=±0.1%, Author="CERN DEM JLC", Component Type=Standard, CreateDate=03.12.2007, HelpURL=\\cern.ch\dfs\Applications\Altium\Datasheets\R0603_Tyco_RN73.pdf, LatestRevisionDate=13.03.2008, Manufacturer Part Number=R0603_12K4_0.1%_0.063W_10PPM, Mounted=Yes, Part Description="Thin Film Chip Resistor", Part Number=R0603_12K4_0.1%_0.063W_10PPM, Pin Count=2, Sense=No, SMD=Yes, Socket=No, Status="Not recommended", TC=±10ppm
R3: library part R0402_1M5_1%_0.0625W_100PPM, "Resistor - 1%", Case=0402, Manufacturer=GENERIC, Manufacturer1 ComponentHeight=0.4mm, Manufacturer1 Example="YAGEO PHYCOMP", Manufacturer1 Part Number=232270671505L, Power=0.0625W, Tolerance=±1%, Author="CERN DEM JLC", Component Type=Standard, CreateDate=03/12/2007, HelpURL=\\cern.ch\dfs\Applications\Altium\Datasheets\R0402_Phycomp_RC0402.pdf, LatestRevisionDate=17/10/2012, Manufacturer Part Number=R0402_1M5_1%_0.0625W_100PPM, Mounted=Yes, Part Description="General Purpose Thick Film Chip Resistor", Part Number=R0402_1M5_1%_0.0625W_100PPM, Pin Count=2, PressFit=No, Sense=No, SMD=Yes, Socket=No, Status="Not Recommended", TC=±100ppm/°C
R6 R7 R8 R10 R11: library part R0402_49R9_1%_0.0625W_100PPM, "Resistor - 1%", Case=0402, Manufacturer=GENERIC, Manufacturer1 ComponentHeight=0.4mm, Manufacturer1 Example="YAGEO PHYCOMP", Manufacturer1 Part Number="232270674999L or RC0402FR-0749R9L", Power=0.0625W, Tolerance=±1%, Author="CERN DEM JLC", Component Type=Standard, CreateDate=2012-10-24, HelpURL=\\cern.ch\dfs\Applications\Altium\Datasheets\R0402_Phycomp_RC0402.pdf, LatestRevisionDate=2012-10-24, Manufacturer Part Number=R0402_49R9_1%_0.0625W_100PPM, Mounted=Yes, Part Description="General Purpose Thick Film Chip Resistor", Part Number=R0402_49R9_1%_0.0625W_100PPM, Pin Count=2, SMD=Yes, Socket=No, Status="Not recommended", Table="Resistors SMD", TC=±100ppm/°C
R9: library part R0402_10R_1%_0.0625W_200PPM, "Resistor - 1%", Case=0402, Manufacturer=GENERIC, Manufacturer1 ComponentHeight=0.4mm, Manufacturer1 Example="YAGEO PHYCOMP", Manufacturer1 Part Number=232270671009L, Power=0.0625W, Tolerance=±1%, Author="CERN DEM JLC", Component Type=Standard, CreateDate=24.06.2009, HelpURL=\\cern.ch\dfs\Applications\Altium\Datasheets\R0402_Phycomp_RC0402.pdf, LatestRevisionDate=17.10.2012, Manufacturer Part Number=R0402_10R_1%_0.0625W_200PPM, Mounted=Yes, Part Description="General Purpose Thick Film Chip Resistor", Part Number=R0402_10R_1%_0.0625W_200PPM, Pin Count=2, Sense=No, SMD=Yes, Socket=No, Status="Not recommended", TC=±200ppm/°C
R12: library part R0402_150K_1%_0.0625W_100PPM, "Resistor - 1%", Case=0402, Manufacturer=GENERIC, Manufacturer1 ComponentHeight=0.4mm, Manufacturer1 Example="YAGEO PHYCOMP", Manufacturer1 Part Number=232270671504L, Power=0.0625W, Tolerance=±1%, Author="CERN DEM JLC", Component Type=Standard, CreateDate=03/12/2007, HelpURL=\\cern.ch\dfs\Applications\Altium\Datasheets\R0402_Phycomp_RC0402.pdf, LatestRevisionDate=17/10/2012, Manufacturer Part Number=R0402_150K_1%_0.0625W_100PPM, Mounted=Yes, Part Description="General Purpose Thick Film Chip Resistor", Part Number=R0402_150K_1%_0.0625W_100PPM, Pin Count=2, PressFit=No, Sense=No, SMD=Yes, Socket=No, Status="Not Recommended", TC=±100ppm/°C
R13: library part R0402_43K_1%_0.0625W_100PPM, "Resistor - 1%", Case=0402, Manufacturer=GENERIC, Manufacturer1 ComponentHeight=0.4mm, Manufacturer1 Example="YAGEO PHYCOMP", Manufacturer1 Part Number=232270674303L, Power=0.0625W, Tolerance=±1%, Author="CERN DEM JLC", Component Type=Standard, CreateDate=03/12/2007, HelpURL=\\cern.ch\dfs\Applications\Altium\Datasheets\R0402_Phycomp_RC0402.pdf, LatestRevisionDate=17/10/2012, Manufacturer Part Number=R0402_43K_1%_0.0625W_100PPM, Mounted=Yes, Part Description="General Purpose Thick Film Chip Resistor", Part Number=R0402_43K_1%_0.0625W_100PPM, Pin Count=2, PressFit=No, Sense=No, SMD=Yes, Socket=No, Status="Not Recommended", TC=±100ppm/°C
U1: library part CMP-0304-00173-2, "ARM Cortex-M0 32-bit MCU, 128 KB Flash, 16 KB Internal RAM, 37 I/Os, 48-Pin UFQFPN, -40 to 85 degC, Tray", I/Os (High Current)=37, Manufacturer=STMicroelectronics, Operating Frequency(F) (Processor speed) (MHz)=48, Package Description="48-Pin Ultra Thin Fine Pitch Quad Flat No-Lead, 7 x 7 x 0.6 mm Body, 0.5 mm Pitch, Exposed Pad", Package Reference=UFQFPN48, Supply Voltage(Vcc) min (V)=2, ComponentLink1Description="Manufacturer URL", ComponentLink1URL=http://www.st.com/, ComponentLink2Description=Datasheet, ComponentLink2URL=http://www.st.com/st-web-ui/static/active/en/resource/technical/document/datasheet/DM00090510.pdf, Core="ARM Cortex-M0", D/A Converter=1, DatasheetVersion="Rev. 5", FLASH Size (Prog) (kB)=128, Internal RAM Size (kB)=16, Mounting Technology="Surface Mount", Packing=Tray, PartNumber=STM32F072CBU6
U2: library part CMP-2000-06522-1, "Single-Port Ethernet Controller with SPI Interface, 3.1 to 3.5 V, -40 to 85 degC, 32-Pin MLF, RoHS, Tape and Reel", Manufacturer=Micrel, Maximum Operating Temperature=+85C, Maximum Supply Current=85mA, Minimum Operating Temperature=-40C, Package / Case=MLF-32, Package Description="32-Pin Quad Flat No-lead Package, Body 5 x 5 mm, Thermal Pad 3.1 x 3.1 mm, Pitch 0.5 mm", Supply Voltage - Max=3.5V, Supply Voltage - Min=3.1V, Brand=Micrel, Data Rate=100Mbps, Datasheet URL=http://ww1.microchip.com/downloads/en/DeviceDoc/00002381A.pdf, Datasheet Version=11/2016, Ethernet Connection Type=10/100Base-TX, Factory Pack Quantity=1000, Manufacturer URL=http://www.microchip.com/, Mounting Style=SMD/SMT, Mounting Technology=SurfaceMount, Number of Transceivers=1Transceiver, Package Reference=MLF-32, Packaging=Reel, Product=EthernetControllers, Product Category=EthernetICs, Protocol Supported=802.3, RoHS=Details, Series=KSZ8851
X1: library part X_CRYSTAL_SMD_5.0*3.2, "miniature crystal oscillator (Maritex)"

## Via types
v1: diameter 0.5, hole 0.2, Top Layer to Bottom Layer, tented both sides, 25 vias
v2: diameter 0.5, hole 0.2, Top Layer to Bottom Layer, 9 vias

## Nets (pads, with @x,y where several pads share a name; then routed paths per layer and width w, separated by ;. In a path a pad name is that pad's centre, name@x,y a point inside that pad or via, vN(x,y) a via of type N, cw(c..) or ccw(c..) an arc to the next point about the centre after c; other vN are vias at no path point)
CAN_MOD: U1.20
GND: C1.1 C2.1 C3.1 C4.1 C5.1 C6.1 C10.1 C11.1 C14.1 C15.2 C16.1 C17.2 C18.2 C19.2 C20.2 C21.2 C22.2 C23.2 C25.1 C26.1 C27.1 C28.1 C29.1 C30.1 C31.1 C32.1 IC3.9 IC3.10 IC3.13 IC4.3 IC5.3 R4.2 R13.2 U1.8 U1.23 U1.35 U1.47 U1.49
  other v1: 102.165,75.155 103.265,75.155 104.365,75.155 105.465,75.155 106.565,75.155 102.165,76.255 103.265,76.255 104.365,76.255 105.465,76.255 106.565,76.255 102.165,77.355 103.265,77.355 104.365,77.355 105.465,77.355 106.565,77.355 102.165,78.455 103.265,78.455 104.365,78.455 105.465,78.455 106.565,78.455 102.165,79.555 103.265,79.555 104.365,79.555 105.465,79.555 106.565,79.555
INT: R5.1
NetC1_2: C1.2 U1.18
NetC2_2: C2.2 U1.19
NetC4_2: C4.2 Q1.1 U1.5
NetC5_2: C5.2 Q1.2 U1.6
NetC10_2: C10.2 R3.1 X1.1
NetC11_2: C11.2 R3.2 X1.2
NetC14_2: C14.2 R9.2
NetC16_2: C16.2 R10.1 R11.1
NetC24_1: C24.1 IC3.11
NetC24_2: C24.2 IC3.8 L1.1
NetC25_2: C25.2 IC3.7 L1.2
NetC28_2: C28.2 IC3.6
NetC29_2: C29.2 C30.2 IC3.1
NetIC3_4: IC3.4 R12.1
NetIC3_5: IC3.5 R12.2 R13.1
NetU1_32: U1.32
NetU1_33: U1.33
NetU1_44: U1.44
P3V3: C7.2 C8.2 C9.2 C18.1 C32.2 D1.1 FB1.1 IC5.2 R1.1 R2.2 R5.2 U1.1 U1.24 U1.36 U1.48
P3V3A: C17.1 C19.1 C20.1 C21.1 C22.1 C23.1 FB1.2 R6.2 R7.2 R9.1
P3V3REF: C6.2 IC4.2 U1.9
P5V0: C26.2 C27.2 C31.2 IC3.2 IC3.12 IC4.1 IC5.1
PGOOD: IC3.3
RESETn: C3.2 D1.2 R1.2 U1.7
RJ45_RX_C_N: C13.2
RJ45_RX_C_P: C12.2
RJ45_RX_N: C13.1 R11.2
RJ45_RX_P: C12.1 R10.2
RJ45_TX_N: R6.1
RJ45_TX_P: R7.1
Rx: U1.31
SCL1: U1.42
SDA1: U1.43
SPI1_MISO: R8.1
SPI1_MOSI: U1.41
SPI1_NSS: R2.1
SPI_NSS: U1.38
SPI_SCK: U1.39
SWCLK: U1.37
SWDIO: U1.34
Tx: U1.30
pads on no net: C7.1 C8.1 C9.1 C15.1 IC2.1 IC2.2 IC2.3 IC2.4 IC2.5 IC2.6 IC2.7 IC2.8 IC2.9 IC2.10 J1.1 J1.2 J2.A1 J2.A2 J2.A3 J2.A4 J2.A5 J2.A6 J2.A7 J2.A8 J2.A9 J2.A10 J2.A11 J2.A12 J2.B1 J2.B2 J2.B3 J2.B4 J2.B5 J2.B6 J2.B7 J2.B8 J2.B9 J2.B10 J2.B11 J2.B12 J2.MECH J2.SHIELD J3.1 J3.2 J3.3 J3.4 J3.5 J3.6 J3.7 J3.8 J3.9 J3.10 J3.11 J3.12 J3.13 J3.14 J3.15 J3.16 J3.17 J3.18 J3.19 J3.20 J3.21 J3.22 J3.23 J3.24 J3.25 J3.26 J3.27 J3.28 J3.29 J3.30 R4.1 R8.2 U1.2 U1.3 U1.4 U1.10 U1.11 U1.12 U1.13 U1.14 U1.15 U1.16 U1.17 U1.21 U1.22 U1.25 U1.26 U1.27 U1.28 U1.29 U1.40 U1.45 U1.46 U2.1 U2.2 U2.3 U2.4 U2.5 U2.6 U2.7 U2.8 U2.9 U2.10 U2.11 U2.12 U2.13 U2.14 U2.15 U2.16 U2.17 U2.18 U2.19 U2.20 U2.21 U2.22 U2.23 U2.24 U2.25 U2.26 U2.27 U2.28 U2.29 U2.30 U2.31 U2.32 U2.33
copper on no net:
  other v2: 95.928,77.005 97.028,77.005 98.128,77.005 95.928,78.105 97.028,78.105 98.128,78.105 95.928,79.205 97.028,79.205 98.128,79.205

## Silkscreen, mask and mechanical layers (free items; w line width, h text height)
Mechanical 1:
  circle w0.254: c105.441,78.552 r12.5